# EAGLE board card_adapter (EAGLE 6.5.0)
HEIGHT: 1.2; PARTNAME: Card Adapter; REVISION: 1; SD: ASSY-VARIANT; SIM: ASSY-VARIANT; WIDTH: 1.5
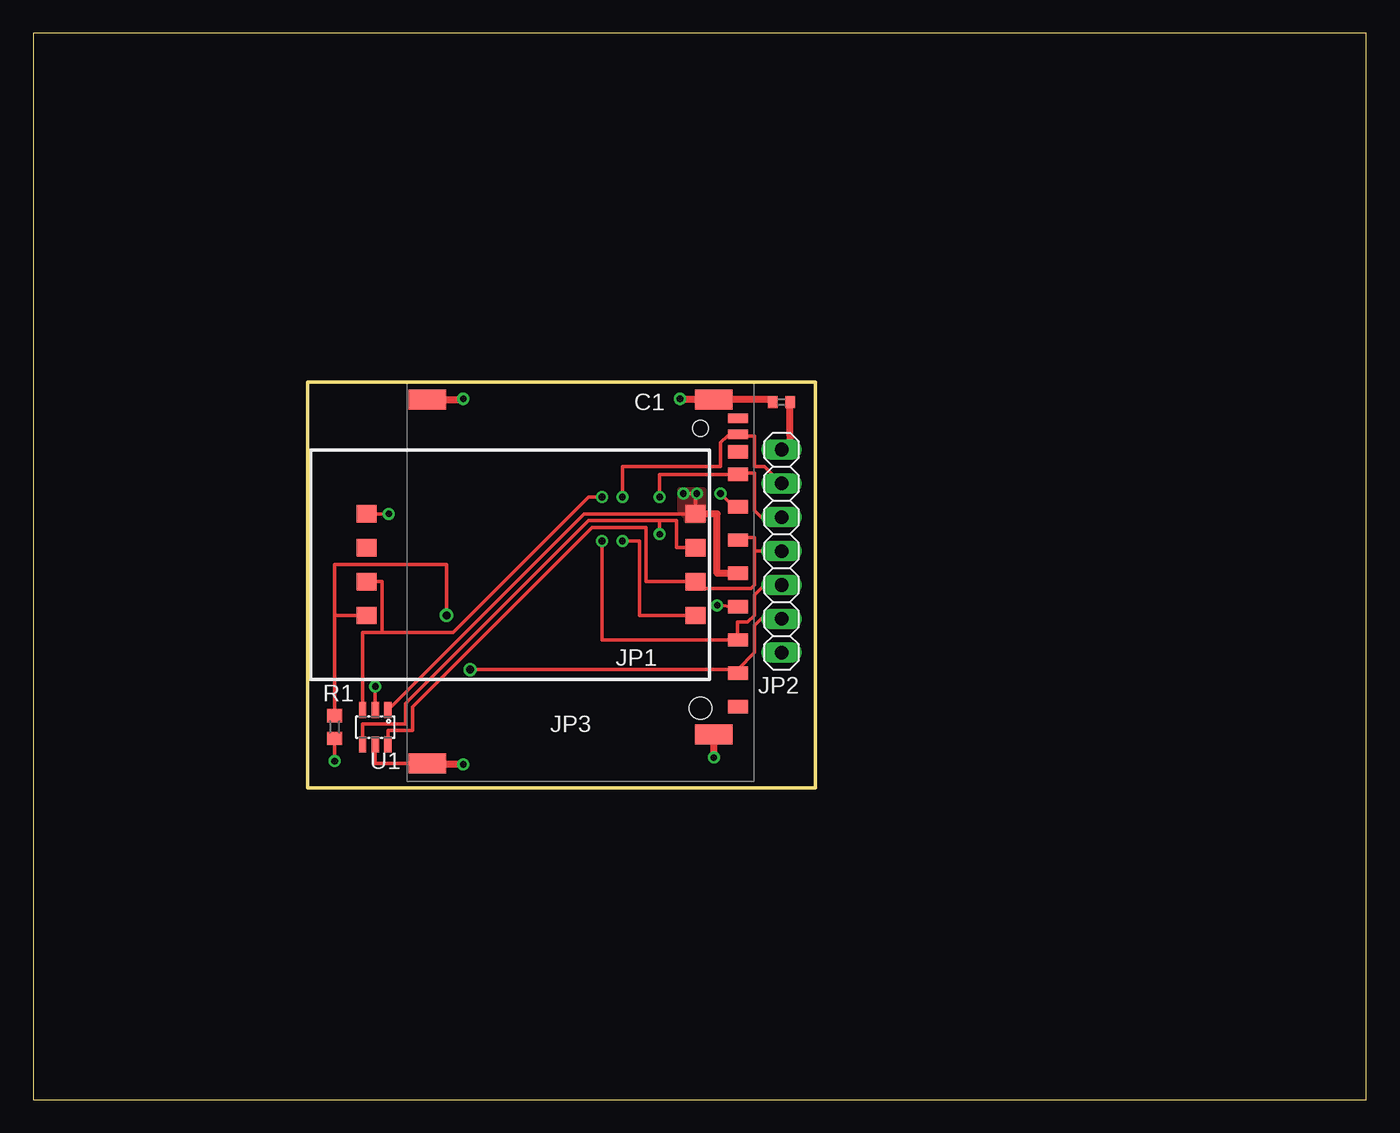
[diagram p0: board, top side]
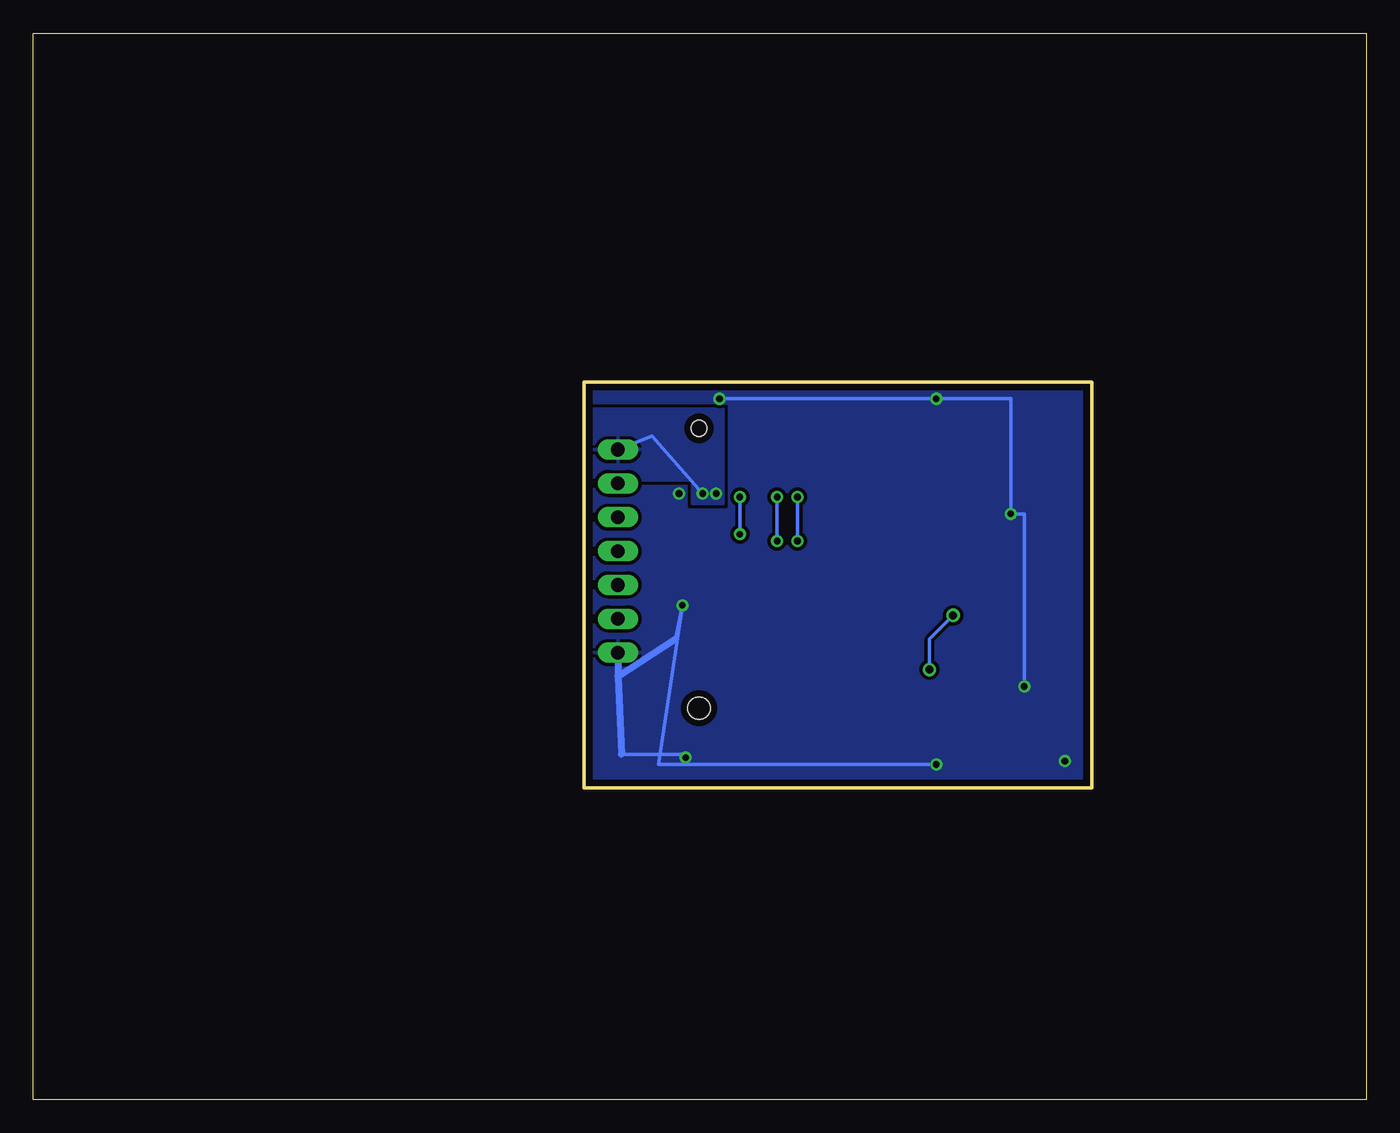
[diagram p1: board, bottom side, seen from below]

Size 100 x 80 mm. Coordinates in mm from the lower left corner, seen from the top.
Outline: 0,0 100,0 100,80 0,80 0,0
Outline: 58.67,53.85 58.67,23.37 20.57,23.37 20.57,53.85 58.67,53.85
Copper layers (1*16): Top 0.035mm / dielectric 1.5mm / Bottom 0.035mm
Design rules "default *": minimum track width 10mil, minimum drill 19mil, track to track 10mil, track to pad 10mil, pad to pad 10mil, via to via 10mil, smd to smd 8mil, copper to edge 20mil, drill to drill 10mil, minimum pad ring 10mil, minimum via ring 8mil, stop-mask expansion 4mil, vias tented up to drill 0mil, thermal gap 10mil

## Footprints (pad centres in the part's own frame; a part is rotated, then mirrored left to right if it is on the bottom)
C0402 = smd 0.7 x 0.9: 1 -0.65,0; 2 0.65,0
CCM03-SIMHOLDER = smd 1.5 x 1.3: CLOCK 12.35,-1.27; GND -12.35,3.81; IO -12.35,-1.27; RESET 12.35,1.27; SW1 12.35,-3.81; SW2 -12.35,-3.81; VCC 12.35,3.81; VPP -12.35,1.27
1X07 = drill 1.016 long: 1 -7.62,0; 2 -5.08,0; 3 -2.54,0; 4 0,0; 5 2.54,0; 6 5.08,0; 7 7.62,0
SDHOLDER-9PIN = smd 1 x 1.5: 1 6.875,1.8; 2 4.375,1.8; 3 1.875,1.8; 4 -0.625,1.8; 5 -3.125,1.8; 6 -5.625,1.8; 7 -8.05,1.8; 8 -9.75,1.8; 9 9.375,1.8 | smd 0.7 x 1.5: CDETECT -11.05,1.8; WPROTECT -12.25,1.8 | smd 1.5 x 2.8: CDGND 11.45,0; CDGND_BOT 13.65,-21.5; WPGND -13.65,0; WPGND_BOT -13.65,-21.5 | hole 1.18: -11.5,-1 | hole 1.68: 9.5,-1
R0603 = smd 1 x 1.1: 1 -0.85,0; 2 0.85,0
SOT23-6L = smd 0.55 x 1.2: 1 -0.95,-1.3; 2 0,-1.3; 3 0.95,-1.3; 4 0.95,1.3; 5 0,1.3; 6 -0.95,1.3

## Placement (x,y rotation side)
C1  100 nF  [C0402]  56.13,52.32 180 top
JP1  SIMHOLDER-8PINHING  [CCM03-SIMHOLDER]  37.34,40.13 0 top
JP2  [1X07]  56.13,41.15 90 top
JP3  SDCARD-HOLDER  [SDHOLDER-9PIN]  51.05,38.86 270 top
R1  10K  [R0603]  22.61,27.94 270 top
U1  ESDA6V1SC6  [SOT23-6L]  25.65,27.94 180 top

## Library data of the parts
C1 = rcl; DIGIKEY-PN: 445-1265-1-ND
JP1 = components; DESCRIPTION: Hinged SIM Card Holder; DIGIKEY-PN: 401-1722-1-ND
JP2 = pinhead; POPULATE: no
JP3 = components; DIGIKEY-PN: 732-3817-1-ND; POPULATE-SIM: no
R1 = rcl; DIGIKEY-PN: P10.0KHCT-ND
U1 = components; DESCRIPTION: Fast ESD Diodes (Quadpack); DIGIKEY-PN: SMF05CCT-ND

## Nets
GND: C1.2 JP1.GND JP2.1 JP3.3 JP3.6 JP3.CDGND JP3.CDGND_BOT JP3.WPGND JP3.WPGND_BOT R1.2 U1.2 U1.5
IO1: JP1.SW2 JP2.2 JP3.1 R1.1
IO2: JP1.IO JP2.3 JP3.2 U1.3
IO3: JP1.RESET JP2.5 JP3.7 U1.4
IO4: JP1.CLOCK JP2.4 JP3.5 U1.6
SENSE: JP1.SW1 JP2.6 JP3.CDETECT
VCC: C1.1 JP1.VCC JP2.7 JP3.4 U1.1

## Tracks (layer width: path | path; a pad name or v marks a point on that pad's centre or on a via)
GND  (via drill 0.5)
  Top 0.254: 29.55,25.15 JP3.CDGND_BOT 25.65,25.21 U1.5 | JP1.GND v26.67,43.94 | U1.2 v25.65,30.99 | v22.61,25.4 R1.2 | 32.26,52.51 v32.26,52.58 | 48.51,52.51 v48.51,52.58 | C1.2 55.3,52.51 | JP3.3 52.67,36.99 v51.31,37.08 | JP3.6 52.54,44.49 v51.56,45.47
  Top 0.508: v51.05,25.65 JP3.CDGND | v32.26,25.15 29.55,25.15 | JP3.WPGND_BOT 32.26,52.51 | 48.51,52.51 JP3.WPGND 55.3,52.51
  Bottom 0.254: 55.88,25.91 51.05,25.91 v51.05,25.65 | 51.82,34.54 v51.31,37.08 53.09,25.15 v32.26,25.15 | v25.65,30.99 25.65,43.94 v26.67,43.94 26.67,52.58 v32.26,52.58 v48.51,52.58
  Bottom 0.508: JP2.1 56.13,31.75 | 56.13,31.75 55.88,25.91 | 56.13,31.75 51.82,34.54
  pour Bottom (rank 2): 20.32,53.85 58.42,53.85 58.42,23.88 20.32,23.88
IO1  (via drill 0.6)
  Top 0.254: JP3.1 52.85,32.26 | JP2.2 54.61,36.07 54.1,35.56 54.1,33.53 52.85,32.28 52.85,32.26 | R1.1 22.61,35.81 22.61,36.32 | 22.61,36.32 JP1.SW2 | 52.85,32.26 v32.77,32.26 | v30.99,36.32 30.99,40.13 22.61,40.13 22.61,36.32
  Bottom 0.254: v32.77,32.26 32.77,34.54 v30.99,36.32
IO2  (via drill 0.5)
  Top 0.254: JP1.IO 26.16,38.86 26.16,35.05 | 26.16,35.05 24.7,35.05 U1.3 | 53.03,34.49 JP3.2 | JP3.2 52.83,34.51 52.83,35.81 53.59,35.81 54.1,36.32 54.1,37.85 54.86,38.61 JP2.3 | 26.16,35.05 31.5,35.05 41.66,45.21 v42.67,45.21 | v42.67,41.91 42.67,34.49 JP3.2
  Bottom 0.254: v42.67,45.21 v42.67,41.91
IO3  (via drill 0.5)
  Top 0.254: U1.4 24.7,28.19 27.94,28.19 27.94,29.72 41.66,43.43 46.99,43.43 | 46.99,43.43 48.26,43.43 48.26,41.4 JP1.RESET | JP3.7 46.99,46.91 v46.99,45.21 | v46.99,42.42 46.99,43.43 | 52.85,46.99 JP3.7 | JP2.5 54.61,43.69 54.1,44.2 54.1,46.99 52.93,46.99 JP3.7
  Bottom 0.254: v46.99,45.21 v46.99,42.42
IO4
  Top 0.254: U1.6 26.6,27.69 28.45,27.69 28.45,29.46 41.91,42.93 45.97,42.93 45.97,38.86 JP1.CLOCK | JP1.CLOCK 49.94,38.61 | JP3.5 53.03,42.16 54.1,42.16 54.1,41.15 | JP1.CLOCK 50.2,38.35 53.85,38.35 54.1,38.61 54.1,41.15 | JP2.4 54.1,41.15
SENSE  (via drill 0.5)
  Top 0.254: 50.2,35.81 JP1.SW1 45.47,36.32 45.47,41.91 v44.2,41.91 | v44.2,45.21 44.2,47.5 51.56,47.5 51.56,49.28 52.07,49.78 52.73,49.78 JP3.CDETECT 52.98,49.78 54.1,49.78 54.1,48.01 54.1,47.5 54.86,47.5 JP2.6
  Bottom 0.254: v44.2,45.21 v44.2,41.91
VCC  (via drill 0.5)
  Top 0.254: U1.1 41.31,43.94 JP1.VCC 49.69,45.37 v49.78,45.47 v48.77,45.47
  Top 0.508: JP3.4 51.31,39.49 51.31,43.94 JP1.VCC | C1.1 56.78,49.78 56.78,49.42 JP2.7
  Bottom 0.254: JP2.7 53.59,49.78 v49.78,45.47
  pour Bottom (isolate 0.254): 58.42,46.48 58.42,51.82 48.26,51.82 48.26,44.7 50.55,44.7 50.55,46.48
  pour Top (no thermals): 50.29,43.43 50.29,45.72 48.51,45.72 48.51,44.45 48.51,44.2 49.02,43.69 49.02,43.43